# Altium PCB ATWork2022.PcbDoc
Units mm, origin at the board's own origin, x right, y up, seen from the top; angles counter-clockwise.
Board outline 126.49 x 105.16 mm, 2 copper layers (Top Layer, Bottom Layer); 99 components, 82 nets, 424 pads, 89 vias.
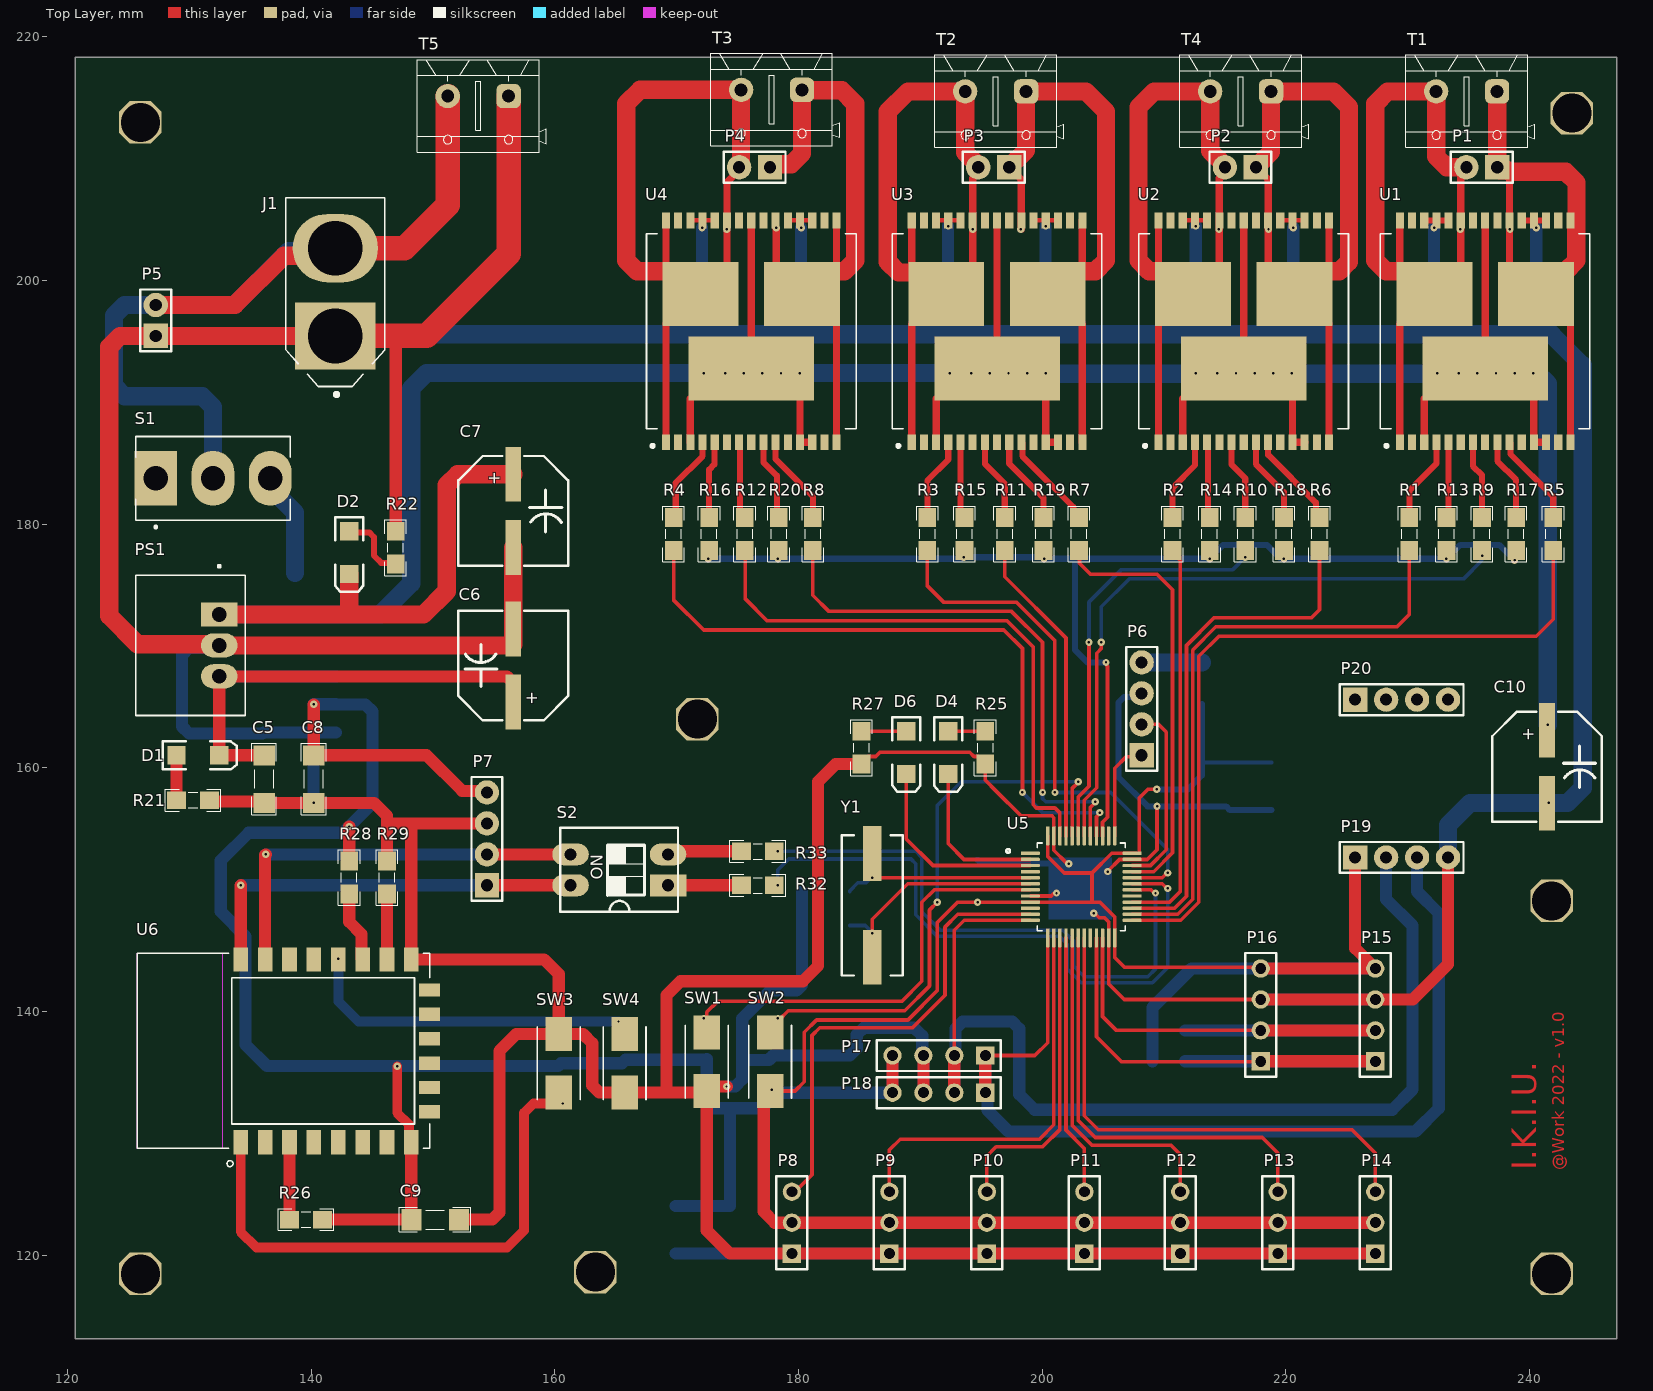
[diagram p0: Top Layer view]
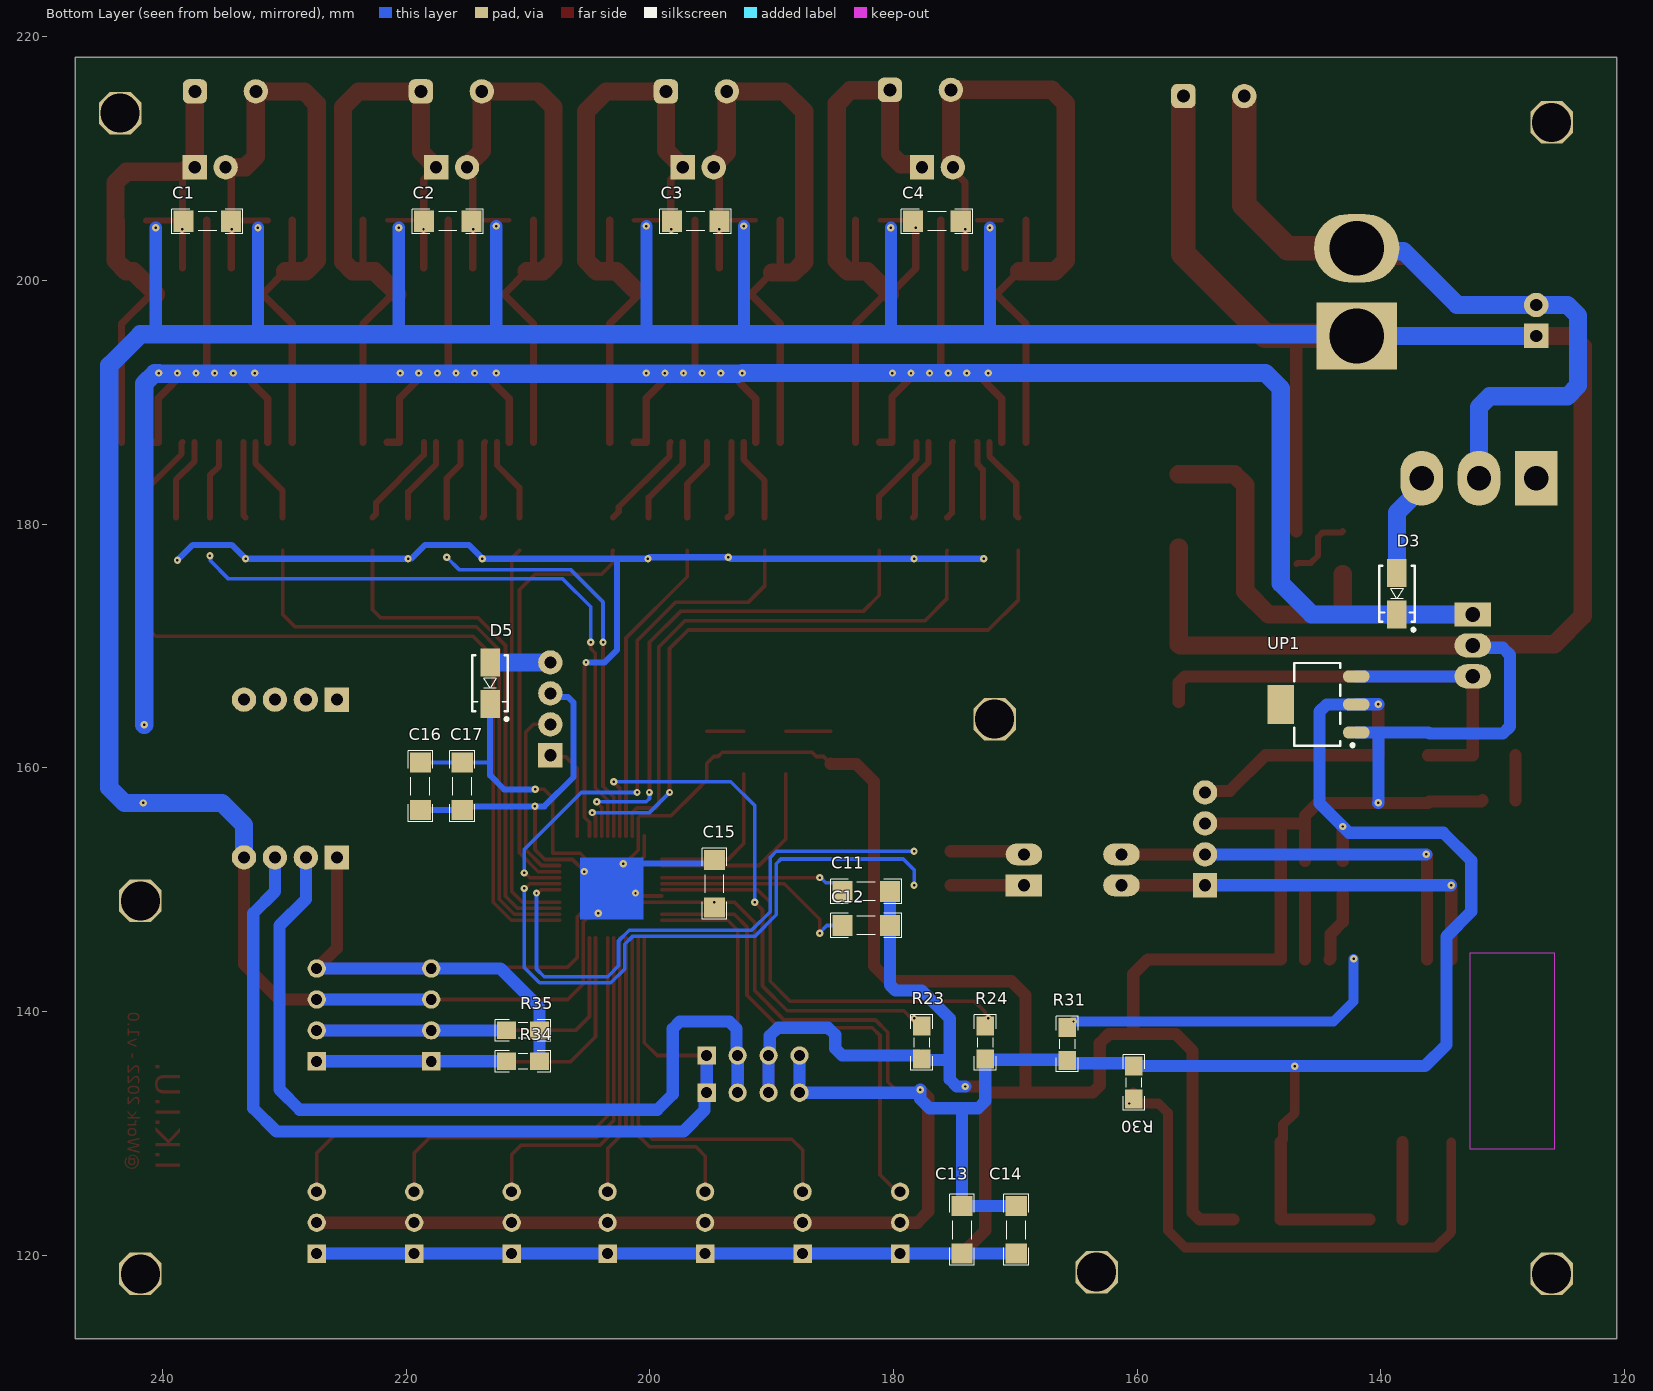
[diagram p1: Bottom Layer view, seen from below]
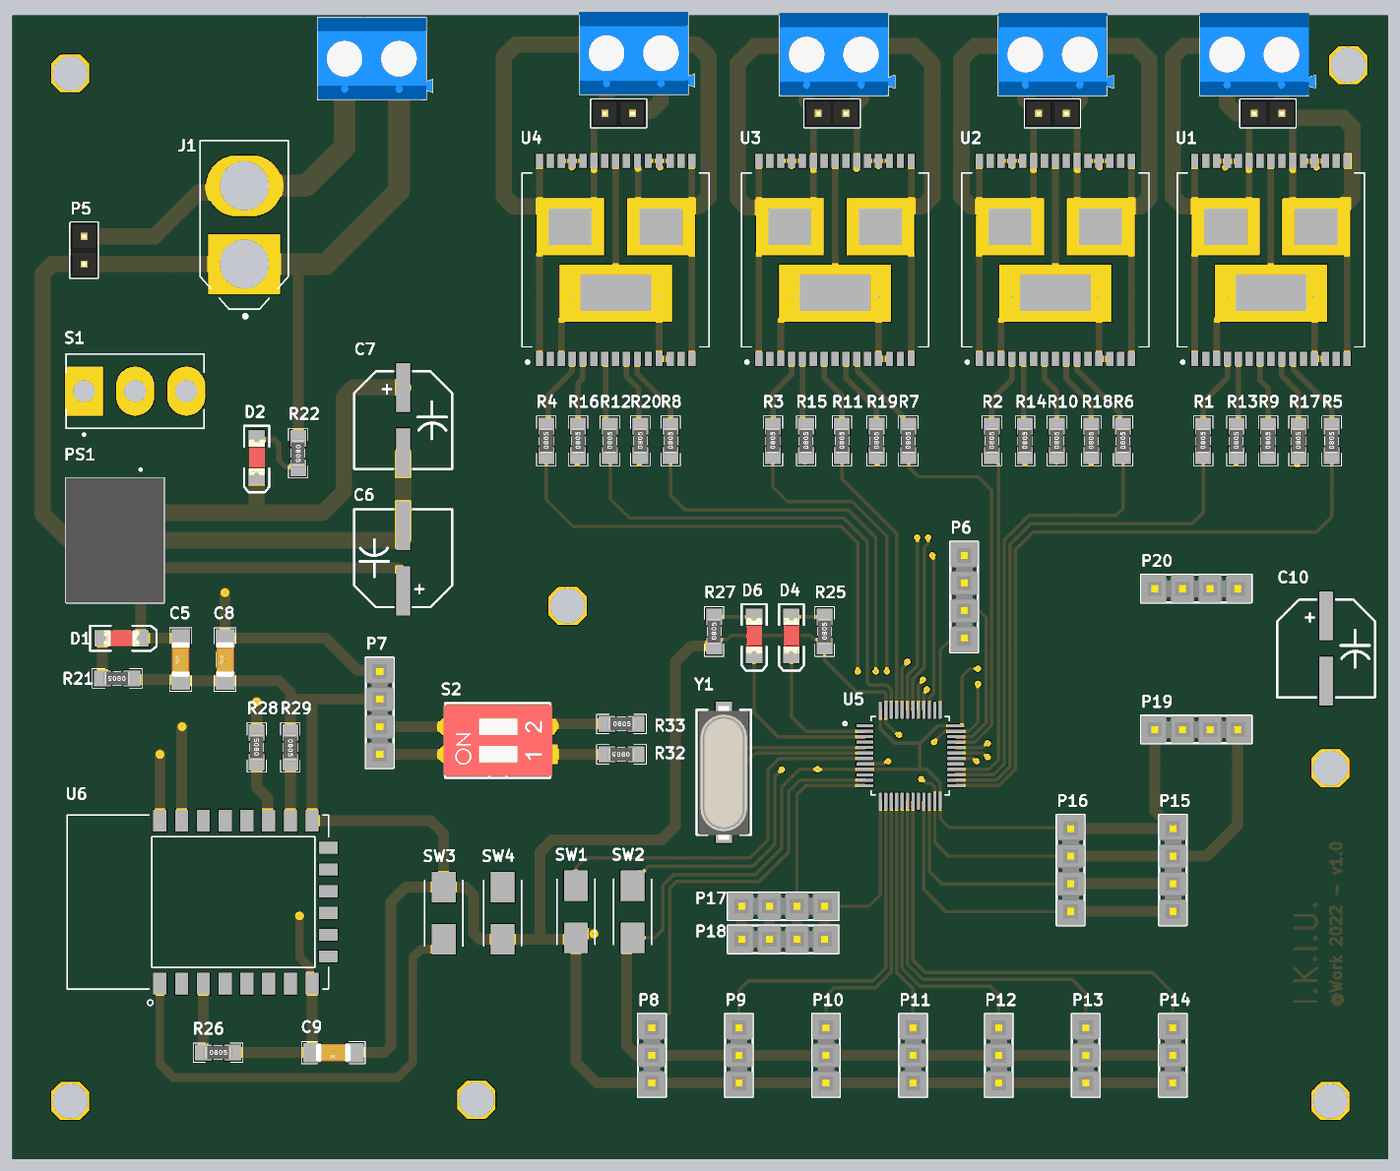
[diagram p2: 3D render of the assembled board from above, using the file's embedded part models]
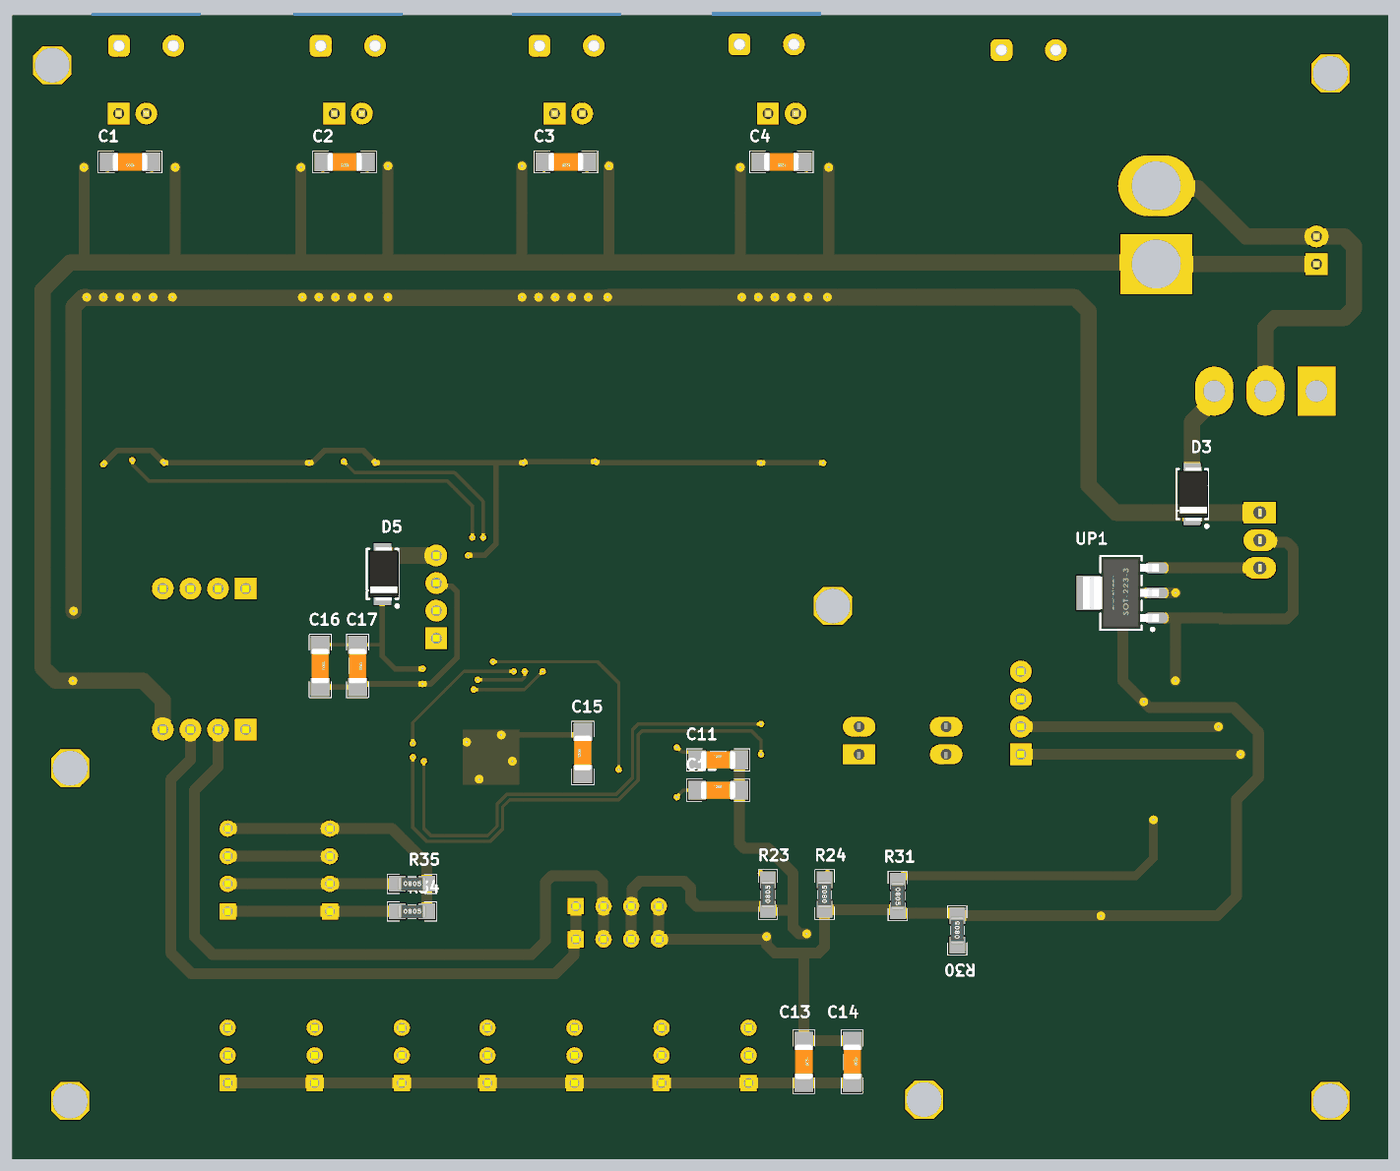
[diagram p3: 3D render of the assembled board from below, using the file's embedded part models]

## Layer stack, top to bottom
Top Solder: solder mask 0.0102, Solder Resist, Dk 3.5
Top Layer: signal copper 0.0356
Dielectric 1: dielectric 0.32, FR-4, Dk 4.8
Bottom Layer: signal copper 0.0356
Bottom Solder: solder mask 0.0102, Solder Resist, Dk 3.5

## Board outline
120.65,113.157 120.65,218.313 247.142,218.313 247.142,113.157

## Design rules (kind name [scope] priority, off if disabled: settings)
Clearance [All] p1: gap=0.2 ignorepadtopadclearanceinfootprint=FALSE except(0.7: Arc-Fill Arc-Poly Arc-Region Track-Fill Track-Poly Track-Region SMDPad-Fill SMDPad-Poly SMDPad-Region THPad-Fill THPad-Poly THPad-Region Via-Fill Via-Poly Via-Region Fill-Fill Fill-Poly Fill-Region Poly-Poly Poly-Region Region-Region)
PolygonConnect [All] p1: connectstyle=Relief reliefconductorwidth=0.3 reliefentries=4 polygonreliefangle="90 Angle" airgapwidth=0.3
RoutingVias [All] p1: holewidth=0.5 width=1 viastyle="Through Hole" minholewidth=0.1 minwidth=0.1 maxholewidth=10 maxwidth=10
SolderMaskExpansion [All] p1: expansion=0.102 istentingtop=FALSE
Width [All] p1: maxlimit=10 minlimit=0.2 preferedwidth=0.3
30 further rules are at their usual default settings.

## Components (designator, comment, footprint, x,y, rotation, side; value= is the part's Value field where it differs from the comment)
C1 "0.1uF" CAPC4817X12N 236.302,204.851 r0 bottom
C2 "0.1uF" CAPC4817X12N 216.58,204.851 r0 bottom
C3 "0.1uF" CAPC4817X12N 196.24,204.851 r0 bottom
C4 "0.1uF" CAPC4817X12N 176.433,204.851 r0 bottom
C5 "0.1uF" CAPC4817X12N 136.144,159.086 r90 top
C6 "100nF" "Cap SMD 100UF 35~50v" 156.591,168.402 r270 top
C7 "100nF" "Cap SMD 100UF 35~50v" 156.591,181.098 r90 top
C8 "0.1uF" CAPC4817X12N 140.224,159.086 r90 top
C9 "0.1uF" CAPC4817X12N 150.174,122.936 r180 top
C10 "100nF" "Cap SMD 100UF 35~50v" 241.427,160.099 r90 top
C11 "0.1uF" CAPC4817X12N 182.245,149.86 r180 bottom
C12 "0.1uF" CAPC4817X12N 182.245,147.066 r180 bottom
C13 "0.1uF" CAPC4817X12N 174.371,122.092 r270 bottom
C14 "0.1uF" CAPC4817X12N 169.926,122.092 r270 bottom
C15 "0.1uF" CAPC4817X12N 194.691,150.495 r90 bottom
C16 "0.1uF" CAPC4817X12N 218.821,158.496 r270 bottom
C17 "0.1uF" CAPC4817X12N 215.392,158.496 r270 bottom
D1 "SMD 1206 LED" "LED 1206" 130.711,161.036 r0 top
D2 "SMD 1206 LED" "LED 1206" 143.129,177.673 r270 top
D3 "1n4007" DIOM4629X24N 138.684,174.293 r270 bottom
D4 "SMD 1206 LED" "LED 1206" 192.278,161.262 r270 top
D5 "1n4007" DIOM4629X24N 213.106,166.956 r270 bottom
D6 "SMD 1206 LED" "LED 1206" 188.849,161.262 r270 top
J1 "XT60-M" *AMASS_XT60-M 141.986,199.053 r90 top
P1 "Header 2" HDR1X2 237.347,209.296 r180 top
P2 "Header 2" HDR1X2 217.535,209.296 r180 top
P3 "Header 2" HDR1X2 197.29,209.296 r180 top
P4 "Header 2" HDR1X2 177.663,209.296 r180 top
P5 "Header 2" HDR1X2 127.254,195.453 r90 top
P6 "Header 4" HDR1X4#1 208.153,161.036 r90 top
P7 "Header 4" HDR1X4#1 154.432,150.368 r90 top
P8 "Header 3" HDR1X3 179.451,120.142 r90 top
P9 "Header 3" HDR1X3 187.452,120.142 r90 top
P10 "Header 3" HDR1X3 195.453,120.142 r90 top
P11 "Header 3" HDR1X3 203.454,120.142 r90 top
P12 "Header 3" HDR1X3 211.328,120.142 r90 top
P13 "Header 3" HDR1X3 219.329,120.142 r90 top
P14 "Header 3" HDR1X3 227.33,120.142 r90 top
P15 "Header 4" HDR1X4#2 227.33,135.923 r90 top
P16 "Header 4" HDR1X4#2 217.932,135.923 r90 top
P17 "Header 4" HDR1X4#2 195.326,136.398 r180 top
P18 "Header 4" HDR1X4#2 195.326,133.35 r180 top
P19 "Header 4" HDR1X4#1 225.679,152.654 r0 top
P20 "Header 4" HDR1X4#1 225.679,165.608 r0 top
PS1 "K7805-2000R3" CONV_K7805-2000R3 130.111,170.053 r270 top
R1 "1K" RESC3413X04N 230.124,179.197 r90 top
R2 "1K" RESC3413X04N 210.693,179.197 r90 top
R3 "1K" RESC3413X04N 190.575,179.197 r90 top
R4 "1K" RESC3413X04N 169.747,179.197 r90 top
R5 "1K" RESC3413X04N 241.935,179.197 r90 top
R6 "1K" RESC3413X04N 222.758,179.197 r90 top
R7 "1K" RESC3413X04N 203.021,179.197 r90 top
R8 "1K" RESC3413X04N 181.177,179.197 r90 top
R9 "1K" RESC3413X04N 236.093,179.197 r90 top
R10 "1K" RESC3413X04N 216.662,179.197 r90 top
R11 "1K" RESC3413X04N 196.925,179.197 r90 top
R12 "1K" RESC3413X04N 175.589,179.197 r90 top
R13 "1K" RESC3413X04N 233.172,179.197 r90 top
R14 "1K" RESC3413X04N 213.741,179.197 r90 top
R15 "1K" RESC3413X04N 193.623,179.197 r90 top
R16 "1K" RESC3413X04N 172.668,179.197 r90 top
R17 "1K" RESC3413X04N 238.887,179.197 r90 top
R18 "1K" RESC3413X04N 219.837,179.197 r90 top
R19 "1K" RESC3413X04N 200.1,179.197 r90 top
R20 "1K" RESC3413X04N 178.383,179.197 r90 top
R21 "1K" RESC3413X04N 130.311,157.353 r180 top
R22 "1K" RESC3413X04N 146.939,178.073 r270 top
R23 "1K" RESC3413X04N 177.673,137.471 r90 bottom
R24 "1K" RESC3413X04N 172.466,137.471 r90 bottom
R25 "1K" RESC3413X04N 195.326,161.662 r90 top
R26 "1K" RESC3413X04N 139.574,122.936 r0 top
R27 "1K" RESC3413X04N 185.166,161.662 r90 top
R28 "1K" RESC3413X04N 143.129,151.003 r90 top
R29 "1K" RESC3413X04N 146.224,151.003 r270 top
R30 "1K" RESC3413X04N 160.274,134.182 r90 bottom
R31 "1K" RESC3413X04N 165.735,137.344 r270 bottom
R32 "1K" RESC3413X04N 176.657,150.368 r180 top
R33 "1K" RESC3413X04N 176.657,153.162 r0 top
R34 "1K" RESC3413X04N 210.392,135.923 r180 bottom
R35 "1K" RESC3413X04N 210.392,138.463 r180 bottom
S1 "" SW_100SP1T1B4M2QE 131.954,183.769 r90 top
S2 "DS2" "DIP Switch x2" 169.291,150.368 r90 top
SW1 "RESET" SW_147873-1 172.466,135.89 r270 top
SW2 "RESET" SW_147873-1 177.673,135.89 r270 top
SW3 "RESET" SW_147873-1 160.321,135.763 r90 top
SW4 "RESET" SW_147873-1 165.735,135.763 r270 top
T1 "KF301_Terminal" "KF301 2PIN" 234.823,215.519 r180 top
T2 "KF301_Terminal" "KF301 2PIN" 196.175,215.519 r180 top
T3 "KF301_Terminal" "KF301 2PIN" 177.788,215.646 r180 top
T4 "KF301_Terminal" "KF301 2PIN" 216.281,215.519 r180 top
T5 "KF301_Terminal" "KF301 2PIN" 153.71,215.138 r180 top (schematic designator T3)
U1 "U1" IC_MULTIPOWERSO-30TR 236.347,195.834 r90 top
U2 "U2" IC_MULTIPOWERSO-30TR 216.535,195.834 r90 top
U3 "U3" IC_MULTIPOWERSO-30TR 196.29,195.834 r90 top
U4 "U4" IC_MULTIPOWERSO-30TR 176.123,195.834 r90 top
U5 "STM32F103C8T6" QFP50P900X900X160-48N 203.2,150.241 r0 top
U6 "ESP8266-12E/ESP-12E" XCVR_ESP8266-12E/ESP-12E 141.224,136.779 r90 top
UP1 "3V3" SOT223 145.224,165.213 r0 bottom
Y1 "12 MHz" "Crystal SMD" 186.055,148.717 r90 top

## Footprints (in the part's own frame and the unit in brackets; to place one, negate y for a bottom-side part, rotate by r counter-clockwise, add the part's x,y. Pads: shape width x height; smd on the part's side, far side on the other; paste and mask are expansions set on the pad)
*AMASS_XT60-M [mm]
  rect 5.516x6.6 hole 4.5: 1(-3.6,0)
  oval 5.6x7 hole 4.5: 2(3.6,0)
  silkscreen extent -8.55,-4.05 7.75,4.05
"Cap SMD 100UF 35~50v" [mm]
  rect 4.5x1.3 smd: 1(3,0) 2(-3,0)
  silkscreen extent -4.5,-4.5 4.5,4.5
CAPC4817X12N [mm] "Chip Capacitor, 2-Leads, Body 4/80x1/70mm, IPC Medium Density-Design:Abbas Basereh"
  rect 1.65x1.75 smd: 1(-1.95,0) 2(1.95,0)
  silkscreen extent -2.92,-1.02 2.92,1.02, body extent -1.6,-0.8 1.6,0.8, height 1
CONV_K7805-2000R3 [mm]
  rect 2x3 hole 1.2: 1(-2.54,2.35)
  oval 2x3 hole 1.2: 2(0,2.35) 3(2.54,2.35)
  silkscreen extent -6.6,-4.5 5.75,4.5, body extent -5.75,-4.5 5.75,4.5, height 17.5
"Crystal SMD" [mm] "DESIGNER ABBAS BASEREH"
  rect 4.5x1.5 smd: 1(-4.25,0) 2(4.25,0)
  silkscreen extent -5.75,-2.5 5.75,2.5, body extent -6.21,-2.25 6.09,2.25, height 5.18
DIOM4629X24N [mm] "Molded Diode, 2-Leads, Body 4/60x2/90mm, IPC Medium Density-Design:Abbas Basereh"
  rect 2.3x1.6 smd: 1(-1.7,0) 2(1.7,0)
  silkscreen extent -2.3,-1.45 3.07,1.47, body extent -2.5,-1.22 2.5,1.48, height 2.2
"DIP Switch x2" [mm] "Switch DIP 2 way flat slide Thru-Hole-Design:Ali Hafizi"
  rect 1.8x3 hole 1: 1(0,0)
  oval 1.8x3 hole 1: 2(2.54,0) 3(2.54,8) 4(0,8)
  silkscreen extent -2.16,-0.82 4.71,8.83, body extent -1.98,-1.03 4.52,8.97, height 6.91
HDR1X2 [mm] "Connector; Header; 2 Position"
  rect 2x2 hole 1: 1(0,0)
  round 2 hole 1: 2(2.54,0)
  silkscreen extent -1.27,-1.27 3.81,1.27, body extent -1.27,-1.28 3.81,1.26, height 8.79
HDR1X3 [mm] "Connector; Header; 3 Position"
  rect 1.5x1.5 hole 0.9: 1(0,0)
  round 1.5 hole 0.9: 2(2.54,0) 3(5.08,0)
  silkscreen extent -1.27,-1.27 6.35,1.27, body extent -1.26,-1.27 6.36,1.27, height 8.38
HDR1X4#1 [mm] "Connector; Header; 4 Position"
  rect 2x2 hole 1: 1(0,0)
  round 2 hole 1: 2(2.54,0) 3(5.08,0) 4(7.62,0)
  silkscreen extent -1.27,-1.27 8.89,1.27, body extent -1.27,-1.28 8.89,1.26, height 8.38
HDR1X4#2 [mm] "Connector; Header; 4 Position"
  rect 1.5x1.5 hole 0.9: 1(0,0)
  round 1.5 hole 0.9: 2(2.54,0) 3(5.08,0) 4(7.62,0)
  silkscreen extent -1.27,-1.27 8.89,1.27, body extent -1.27,-1.28 8.89,1.26, height 8.38
IC_MULTIPOWERSO-30TR [mm]
  rect 1.3x0.665 smd: 1(-9.1,7) 2(-9.1,6) 3(-9.1,5) 4(-9.1,4) 5(-9.1,3) 6(-9.1,2) 7(-9.1,1) 8(-9.1,0) 9(-9.1,-1) 10(-9.1,-2) 11(-9.1,-3) 12(-9.1,-4) 13(-9.1,-5) 14(-9.1,-6) 15(-9.1,-7) 16(9.1,-7) 17(9.1,-6) 18(9.1,-5) 19(9.1,-4) 20(9.1,-3) 21(9.1,-2) 22(9.1,-1) 23(9.1,0) 24(9.1,1) 25(9.1,2) 26(9.1,3) 27(9.1,4) 28(9.1,5) 29(9.1,6) 30(9.1,7)
  rect 5.25x10.3 smd paste-6: HS1(-3.05,0)
  rect 5.25x6.23 smd paste-4: HS2(3.05,4.165) HS3(3.05,-4.165)
  silkscreen extent -9.5,-8.6 8,8.6
"KF301 2PIN" [mm] "Designer Abbas Basereh"
  rrect50% 2x2 hole 1.05: 1(-2.5,0)
  round 2 hole 1.05: 2(2.5,0)
  silkscreen extent -5.6,-3 5,4.6, body extent -5.6,-3 5,4.6, height 10
"LED 1206" [mm]
  rect 1.5x1.5 smd: 1(-1.75,0) 2(1.75,0)
  silkscreen extent -2.9,-1.15 3.2,1.15, body extent -1.65,-0.72 1.65,0.73, height 1.36
QFP50P900X900X160-48N [mm]
  rrect50% 1.56x0.28 smd: 1(-4.18,2.75) 2(-4.18,2.25) 3(-4.18,1.75) 4(-4.18,1.25) 5(-4.18,0.75) 6(-4.18,0.25) 7(-4.18,-0.25) 8(-4.18,-0.75) 9(-4.18,-1.25) 10(-4.18,-1.75) 11(-4.18,-2.25) 12(-4.18,-2.75) 25(4.18,-2.75) 26(4.18,-2.25) 27(4.18,-1.75) 28(4.18,-1.25) 29(4.18,-0.75) 30(4.18,-0.25) 31(4.18,0.25) 32(4.18,0.75) 33(4.18,1.25) 34(4.18,1.75) 35(4.18,2.25) 36(4.18,2.75)
  rrect50% 0.28x1.56 smd: 13(-2.75,-4.18) 14(-2.25,-4.18) 15(-1.75,-4.18) 16(-1.25,-4.18) 17(-0.75,-4.18) 18(-0.25,-4.18) 19(0.25,-4.18) 20(0.75,-4.18) 21(1.25,-4.18) 22(1.75,-4.18) 23(2.25,-4.18) 24(2.75,-4.18) 37(2.75,4.18) 38(2.25,4.18) 39(1.75,4.18) 40(1.25,4.18) 41(0.75,4.18) 42(0.25,4.18) 43(-0.25,4.18) 44(-0.75,4.18) 45(-1.25,4.18) 46(-1.75,4.18) 47(-2.25,4.18) 48(-2.75,4.18)
  silkscreen extent -6.15,-3.6 3.6,3.6
RESC3413X04N [mm] "Chip Resistor, 2-Leads, Body 3/40x1/30mm, IPC Medium Density-Design:Abbas Basereh"
  rect 1.55x1.45 smd: 1(-1.35,0) 2(1.35,0)
  silkscreen extent -2.29,-0.89 2.29,0.89, body extent -1.25,-0.62 1.25,0.62, height 0.79
SOT223 [mm] "SOT223, 4-Leads, Body 6.5x3.5mm, Pitch 2.30mm-Designer Abbas Basereh"
  oval 2.2x1 smd: 1(-3.2,2.3) 2(-3.2,0) 3(-3.2,-2.3)
  rect 2.2x3.2 smd: 4(3,0)
  Top Layer pour cut-out: -1.7,3.556 1.7,3.556 1.7,-3.556 -1.7,-3.556
  silkscreen extent -3.02,-3.4 1.9,3.47, body extent -3.5,-3.25 3.5,3.25, height 1.7
SW_100SP1T1B4M2QE [mm]
  rect 4.5x3.5 hole 2: 1(0,4.7)
  oval 4.5x3.5 hole 2: 2(0,0) 3(0,-4.7)
  silkscreen extent -4.1,-6.35 3.43,6.35
SW_147873-1 [mm]
  rect 2.8x2.2 smd: 1(-2.4,0) 2(2.4,0)
  silkscreen extent -3,-1.75 3,1.75
XCVR_ESP8266-12E/ESP-12E [mm]
  rect 2x1.2 smd: 1(-7.5,7) 2(-7.5,5) 3(-7.5,3) 4(-7.5,1) 5(-7.5,-1) 6(-7.5,-3) 7(-7.5,-5) 8(-7.5,-7) 15(7.5,-7) 16(7.5,-5) 17(7.5,-3) 18(7.5,-1) 19(7.5,1) 20(7.5,3) 21(7.5,5) 22(7.5,7)
  rect 1.1x1.7 smd: 9(-5,-8.5) 10(-3,-8.5) 11(-1,-8.5) 12(1,-8.5) 13(3,-8.5) 14(5,-8.5)
  Keep-Out Layer region: 8,8.51 -8.009,8.51 -8.009,15.5 8,15.5
  Keep-Out Layer region: 8,8.51 -8.009,8.51 -8.009,15.5 8,15.5
  silkscreen extent -9.5,-8.5 8,15.5

## Part data
C1 C2 C3 C4 C5 C8 C9 C11 C12 C13 C14 C15 C16 C17: library part "CAP SMD 1206", "CAP 1206", Data=16-12-2016, Desc.="CAP SMD 1206", Designer="Abbas Basereh"
C6 C7 C10: library part "CAP SMD PACKAGE", "TOTAL CAPACITOR SMD PACK", Data=2017-3-10, Desc.="CAP SMD TOTAL PACKAGES", Designer="Abbas Basereh"
D1 D2 D4 D6: library part "LED SMD 1206"
D3 D5: library part "1n4007 SMD M7", "Standard Rectifiers", Manufacturer="DC COMPONENTS", Data=16-12-2016, Designer="Abbas Basereh", Link=http://www.tme.eu/en/details/m7/smd-universal-diodes/dc-components/, Part. No=M7
J1: "Plug; DC supply; XT60; male; PIN: 2; for cable; soldered; 30A; 500V", Package="Package Analog Devices", Availability=Unavailable, MF=AMASS, MP=XT60-M, Price=None, SnapEDA_Link=https://www.snapeda.com/parts/XT60-M/AMASS/view-part/2883912/?ref=snap
P1 P2 P3 P4 P5: "Header, 2-Pin", LatestRevisionDate=17-Jul-2002, LatestRevisionNote="Re-released for DXP Platform.", Publisher="Altium Limited"
P6 P7 P15 P16 P17 P18 P19 P20: "Header, 4-Pin", LatestRevisionDate=17-Jul-2002, LatestRevisionNote="Re-released for DXP Platform.", Publisher="Altium Limited"
P8 P9 P10 P11 P12 P13 P14: "Header, 3-Pin", LatestRevisionDate=17-Jul-2002, LatestRevisionNote="Re-released for DXP Platform.", Publisher="Altium Limited"
PS1: "éžçµ¶ç¸åž‹ PoL ãƒ¢ã‚¸ãƒ¥ãƒ¼ãƒ« DC DC ã‚³ãƒ³ãƒãƒ¼ã‚¿ 1 å‡ºåŠ› 5V 2A 8V - 36V å…¥åŠ›", Package="SIP-3-3 MORNSUN", Check_prices=https://www.snapeda.com/parts/K7805-2000R3/MORNSUN/view-part/5366399/?ref=eda, Digi-Key_Part_Number=2725-K7805-2000R3-ND, MF="Mornsun America, LLC", MP=K7805-2000R3, SnapEDA_Link=https://www.snapeda.com/parts/K7805-2000R3/MORNSUN/view-part/5366399/?ref=snap
R1 R2 R3 R4 R5 R6 R7 R8 R9 R10 R11 R12 R13 R14 R15 R16 R17 R18 R19 R20 R21 R22 R23 R24 R25 R26 R27 R28 R29 R30 R31 R32 R33 R34 R35: library part "RES 0805 0.125W", "RES 0805", Data=16-12-2016, Desc.="RES SMD 0805", Designer="Abbas Basereh"
S1: library part 100SP1T1B4M2QE, "Toggle Switch SPDT Through Hole", Package=None, Availability=Unavailable, MP=100SP1T1B4M2QE, Price=None
S2: library part "DIP Switch 2", "2 BIT DIP Switch"
SW1 SW2 SW3 SW4: library part 147873-1, "Switch Tactile OFF (ON) SPST Rectangular Button J-Bend 0.05A 24VDC 1.77N SMD T/R", Package=None, Availability=Unavailable, MF="TE Connectivity", MP=147873-1, Price=None, SnapEDA_Link=https://www.snapeda.com/parts/147873-1/TE%20Connectivity%20ALCOSWITCH%20Switches/view-part/2549694/?ref=snap
T1 T2 T3 T4 T5: library part KF301-2Pin_Terminal, "Terminal 2 Pin 250VAC 16A", Designer="Abbas Basereh", Link=https://www.aliexpress.com/item/, Part. No="KF301 2P"
U1 U2 U3 U4: library part VNH5019A-E, "Motor Driver Power MOSFET Parallel, PWM MultiPowerSO-30", Package="PowerSOP-30 STMicroelectronics", Availability=Unavailable, MF=STMicroelectronics, MP=VNH5019A-E, Price=None, SnapEDA_Link=https://www.snapeda.com/parts/VNH5019A-E/STMicroelectronics/view-part/231156/?ref=snap
U5: "Mainstream Performance line, ARM Cortex-M3 MCU with 64 Kbytes Flash, 72 MHz CPU, motor control, USB and CAN", Package=None, Availability=Unavailable, MP=STM32F103C8T6, Price=None
U6: "ESP-12E WiFi Module", Package=None, Availability=Unavailable, MP=ESP8266-12E/ESP-12E, Price=None
UP1: library part AMS1117-x.x, "x.x Volt, 800mA Low-Dropout Linear Regulator, 4-pin SOT-223", Data=16-12-2016, Designer="Ali Hafizi"
Y1: library part XTAL, "XTAL Crystal", ComponentLink1Description=Datasheet, ComponentLink2Description=Reference, Design Date=2017-1-3, Designer="ABBAS BASEREH", Mounting Technology="Surface Mount\Through-Hole", Status=Unreleased

## Free pads (board coordinates)
  oct 3.5x3.5 hole 3.2: 2(125.984,118.491) 2(125.984,212.979) 2(163.322,118.618) 2(171.701,164.006) 2(241.808,118.491) 2(241.808,149.098) 2(243.459,213.741)

## Via types
v1: diameter 0.6, hole 0.2, Top Layer to Bottom Layer, 89 vias

## Nets (pads, with @x,y where several pads share a name; then routed paths per layer and width w, separated by ;. In a path a pad name is that pad's centre, name@x,y a point inside that pad or via, vN(x,y) a via of type N, cw(c..) or ccw(c..) an arc to the next point about the centre after c; other vN are vias at no path point)
+5: C5.2 C6.1 D1.2 PS1.3 UP1.3 | length 45.7
  Top Layer w1: C5.2 D1.2 PS1.3 156.08,167.513 156.591,167.002 C6.1
  Bottom Layer w1: PS1.3 UP1.3
+12: J1.2 P5.2 S1.2 T5.2 | length 77.2
  Top Layer w1.5: P5.2 133.731,197.993 137.768,202.03 141.363,202.03 J1.2
  Top Layer w2: J1.2 147.662,202.653 151.21,206.201 T5.2
  Bottom Layer w1.5: S1.2 131.954,189.621 131.075,190.5 124.704,190.5 123.825,191.379 123.825,197.114 124.704,197.993 P5.2 133.731,197.993 138.147,202.409 141.742,202.409 J1.2
ADC1: P8.3 U5.11 | length 39
  Top Layer w0.3: P8.3 179.705,125.222 181.102,126.619 181.102,138.049 181.737,138.684 189.357,138.684 192.024,141.351 192.024,146.939 193.076,147.991 U5.11
ADC4: P9.3 U5.14 | length 33.1
  Top Layer w0.3: P9.3 187.452,128.651 188.341,129.54 199.771,129.54 200.95,130.719 U5.14
ADC5: P10.3 U5.15 | length 25.6
  Top Layer w0.3: P10.3 195.453,128.143 196.215,128.905 200.025,128.905 201.45,130.33 U5.15
ADC6: P11.3 U5.16 | length 21.5
  Top Layer w0.3: U5.16 201.95,130.282 203.454,128.778 P11.3
ADC7: P12.3 U5.17 | length 28.3
  Top Layer w0.3: U5.17 202.45,130.671 204.089,129.032 210.566,129.032 211.328,128.27 P12.3
ADC8: P13.3 U5.18 | length 35.7
  Top Layer w0.3: U5.18 202.95,131.06 204.343,129.667 218.059,129.667 219.329,128.397 P13.3
ADC9: P14.3 U5.19 | length 42.9
  Top Layer w0.3: U5.19 203.45,131.449 204.597,130.302 225.425,130.302 227.33,128.397 P14.3
BOOT0: R23.2 SW2.1 U5.44 | length 48.1
  Top Layer w0.3: SW2.1 SW2.1@177.673,138.557 ; v1(178.308,139.446) 177.673,138.811 SW2.1@177.673,138.557 ; v1(191.389,148.971) 190.754,148.336 190.754,142.113 188.722,140.081 179.164,140.081 178.435,139.352 178.435,139.319 SW2.1@177.673,138.557 ; U5.44 202.45,158.312 202.946,158.808 v1(202.946,158.877)
  Bottom Layer w0.3: v1(191.389,148.971) 191.389,156.915 193.351,158.877 v1(202.946,158.877)
ESP_BOOT: R31.1 SW4.1 U6.18 | length 27.2
  Bottom Layer w0.8: v1(142.24,144.343) 142.24,140.843 143.891,139.192 v1(165.227,139.192)
ESP_RST: R30.1 SW3.1 U6.1 | length 45.8
  Top Layer w0.8: U6.1 134.224,121.935 135.509,120.65 156.083,120.65 157.48,122.047 157.48,131.699 158.242,132.461 v1(160.655,132.461) ; SW3.1@160.321,132.461 SW3.1
ESP_RX: P7.2 S2.3 U6.21 | length 33.7
  Top Layer w1: U6.21 136.224,152.861 v1(136.271,152.908) ; P7.2 S2.3
  Bottom Layer w1: v1(136.271,152.908) P7.2
ESP_TX: P7.1 S2.4 U6.22 | length 33.1
  Top Layer w1: U6.22 134.224,150.353 v1(134.239,150.368) ; P7.1 S2.4
  Bottom Layer w1: v1(134.239,150.368) P7.1
GND: C5.1 C6.2 C7.2 C8.1 C9.1 C10.2 C11.2 C12.2 C13.2 C14.2 C15.2 C16.2 C17.2 J1.1 P5.1 P6.3 P7.3 P8.1 P9.1 P10.1 P11.1 P12.1 P13.1 P14.1 P15.3 P16.3 P17.3 P18.3 P19.4 PS1.2 R21.1 R22.1 R23.1 R25.1 R27.1 R29.1 SW1.2 SW3.2 SW4.2 T5.1 U1.18 U1.19 U1.20 U1.26 U1.27 U1.28 U2.18 U2.19 U2.20 U2.26 U2.27 U2.28 U3.18 U3.19 U3.20 U3.26 U3.27 U3.28 U4.18 U4.19 U4.20 U4.26 U4.27 U4.28 U5.8 U5.23 U5.35 U5.47 U6.15 UP1.1 | length 840.2
  Top Layer w0.3: SW1.2 SW1.2@172.834,133.858 ; R27.1@185.166,160.362 185.741,160.937 186.337,160.937 186.69,161.29 194.056,161.29 194.409,160.937 194.751,160.937 195.326,160.362 R25.1 195.326,159.004 196.215,158.115 196.215,158.111 198.235,156.091 200.774,156.091 200.95,155.915 200.95,153.253 202,152.203 202.127,152.203 v1(202.184,152.146) ; U5.8 200.718,149.491 200.902,149.676 201.111,149.676 v1(201.168,149.733) ; v1(204.216,148.082) 204.297,148.082 204.678,147.701 205.105,147.701 205.45,147.356 U5.23 205.45,142.276 206.723,141.003 P16.3 ; v1(205.374,151.496) 205.374,151.526 206.339,152.491 208.625,152.491 209.423,153.289 v1(209.423,156.845)
  Top Layer w0.381: U4.28 U4.27 U4.26 ; U4.20 U4.19 U4.18 ; U3.28 U3.27 U3.26 ; U3.20 U3.19 U3.18 ; U2.28 U2.27 U2.26 ; U2.20 U2.19 U2.18
  Top Layer w0.5: U1.28 U1.27 U1.26 ; U1.20 U1.19 U1.18
  Top Layer w1: R21.1 131.77,157.245 136.035,157.245 C5.1 v1(140.224,157.136) 145.171,157.136 146.224,156.083 146.224,155.655 ; J1.1 145.669,195.453 ; R29.1 146.224,155.655 ; R22.1 146.939,195.453 ; C9.1 154.862,122.936 155.448,123.522 155.448,136.779 156.832,138.163 SW3.2 ; P7.3 148.209,155.448 ; SW1.2@172.834,133.858 v1(174.117,133.858) ; R27.1@185.166,160.362 R27.1 183.045,160.312 181.61,158.877 181.61,143.764 180.34,142.494 170.307,142.494 169.164,141.351 169.164,133.363 ; P18.3 P17.3 ; P16.3 P15.3 230.411,141.003 233.299,143.891 P19.4 ; P14.1 P13.1 P12.1 P11.1 P10.1 P9.1 P8.1 174.371,120.142 172.466,122.047 SW1.2 172.339,133.363 169.164,133.363 ; 146.224,155.655 146.431,155.448 148.209,155.448 ; 148.209,155.448 148.224,155.433 U6.15 159.124,144.279 160.321,143.082 SW3.2 ; SW3.2 160.334,138.176 162.306,138.176 163.068,137.414 163.068,133.949 163.654,133.363 SW4.2 169.164,133.363
  Top Layer w1.5: J1.1 P5.1 124.333,195.453 123.444,194.564 123.444,172.466 125.761,170.149 132.365,170.149 PS1.2 156.491,170.053 156.591,170.153 C6.2 C7.2
  Top Layer w2: J1.1@142.528,195.453 J1.1 145.669,195.453 146.939,195.453 149.479,195.453 156.21,202.184 T5.1
  Bottom Layer w0.5: 180.213,195.707 180.34,195.58 ; 192.278,195.707 192.405,195.58 ; C15.2 194.99,152.146 v1(202.184,152.146) ; P6.3 207.866,165.829 206.723,165.829 206.248,165.354 206.248,159.258 208.661,156.845 215.093,156.845 C17.2 C16.2 ; 220.599,195.707 220.726,195.58
  Bottom Layer w1: PS1.2 132.27,169.862 129.999,169.862 129.413,169.276 129.413,163.4 129.999,162.814 136.004,162.814 136.103,162.913 140.434,162.913 ; v1(140.224,157.136) 140.208,157.152 140.208,162.687 140.434,162.913 ; UP1.1 140.434,162.913 ; C14.2 C13.2 P8.1 P9.1 P10.1 P11.1 P12.1 P13.1 P14.1 ; 172.085,195.58 v1(172.085,204.343) ; v1(174.117,133.858) 174.801,133.858 175.387,134.444 175.387,136.034 ; 180.213,195.707 v1(180.213,204.343) ; C11.2 C12.2 180.295,142.195 179.832,141.732 177.673,141.732 175.387,139.446 175.387,136.034 ; P18.3 P17.3 190.15,136.494 190.15,138.018 189.484,138.684 185.371,138.684 184.785,138.098 184.785,136.984 184.199,136.398 177.95,136.398 177.948,136.396 177.898,136.396 177.673,136.171 R23.1 177.586,136.034 175.387,136.034 ; 192.278,195.707 v1(192.278,204.47) ; 200.279,195.58 v1(200.279,204.47) ; 212.598,195.58 v1(212.598,204.47) ; P16.3 P15.3 ; 220.599,195.707 v1(220.599,204.343) ; 232.156,195.58 v1(232.156,204.343) ; 240.538,195.58 v1(240.538,204.343)
  Bottom Layer w1.5: P5.1 J1.1 142.113,195.58 172.085,195.58 180.34,195.58 192.405,195.58 200.279,195.58 212.598,195.58 220.726,195.58 232.156,195.58 240.538,195.58 241.808,195.58 244.348,193.04 244.348,158.369 243.109,157.13 235.108,157.13 233.299,155.321 P19.4
  other v1: 241.554,157.13
I2C_SCL: P15.1 P16.1 R34.1 U5.21 | length 47.5
  Top Layer w0.3: U5.21 204.45,137.942 206.502,135.89 217.899,135.89 P16.1
  Top Layer w1: P16.1 P15.1
  Bottom Layer w1: R34.1 P16.1 P15.1
I2C_SDA: P15.2 P16.2 R35.1 U5.22 | length 44.9
  Top Layer w0.3: U5.22 204.95,139.601 206.088,138.463 P16.2
  Top Layer w1: P16.2 P15.2
  Bottom Layer w1: R35.1 P16.2 P15.2
INA1: R1.1 U5.26 | length 50.2
  Top Layer w0.3: U5.26 211.11,147.991 212.344,149.225 212.344,169.672 214.249,171.577 229.108,171.577 230.124,172.593 R1.1
INA2: R2.1 U5.28 | length 32.6
  Top Layer w0.3: U5.28 210.459,148.991 211.328,149.86 211.328,177.046 211.268,177.106 211.268,177.272 R2.1
INA3: R3.1 U5.32 | length 43.9
  Top Layer w0.3: R3.1 190.575,174.931 191.897,173.609 197.866,173.609 201.041,170.434 v1(201.041,157.988) ; U5.32 209.838,150.991 210.231,151.384 v1(210.312,151.384)
  Bottom Layer w0.3: v1(201.041,157.988) 205.613,157.988 210.312,153.289 v1(210.312,151.384)
INA4: R4.1 U5.40 | length 55.2
  Top Layer w0.3: R4.1 169.747,173.788 172.212,171.323 196.85,171.323 198.374,169.799 v1(198.374,157.988) ; U5.40 204.45,155.997 204.709,156.256 v1(204.709,156.337)
  Bottom Layer w0.3: v1(198.374,157.988) 200.025,156.337 v1(204.709,156.337)
INB1: R5.1 U5.25 | length 62.3
  Top Layer w0.3: U5.25 211.372,147.491 212.852,148.971 212.852,169.164 214.503,170.815 240.538,170.815 241.935,172.212 R5.1
INB2: R6.1 U5.27 | length 42.4
  Top Layer w0.3: U5.27 210.848,148.491 211.836,149.479 211.836,170.053 214.122,172.339 222.123,172.339 222.758,172.974 R6.1
INB3: R7.1 U5.33 | length 35.1
  Top Layer w0.3: R7.1 203.059,177.809 203.059,176.798 203.962,175.895 209.423,175.895 210.693,174.625 210.693,153.035 209.149,151.491 U5.33
INB4: R8.1 U5.41 | length 44.3
  Top Layer w0.3: R8.1 181.177,174.169 182.499,172.847 197.485,172.847 200.025,170.307 v1(200.025,157.988) ; U5.41 203.95,156.752 204.343,157.145 v1(204.343,157.226)
  Bottom Layer w0.3: v1(200.025,157.988) 200.025,157.48 200.279,157.226 v1(204.343,157.226)
LED1: D4.2 U5.2 | length 13
  Top Layer w0.3: D4.2 192.278,153.797 193.584,152.491 U5.2
LED2: D6.2 U5.3 | length 16.4
  Top Layer w0.3: D6.2 188.849,154.178 191.036,151.991 U5.3
MOTORS_EN: R13.1 R14.1 R15.1 R16.1 R17.1 R18.1 R19.1 R20.1 U5.39 | length 93.1
  Top Layer w0.3: U5.39 204.95,155.547 205.359,155.956 205.359,168.33 205.289,168.4 205.289,168.599 v1(205.232,168.656)
  Bottom Layer w0.5: v1(172.593,177.165) 193.394,177.165 193.521,177.292 v1(193.548,177.292) 199.998,177.292 200.125,177.165 v1(200.152,177.165) 202.692,177.165 ; v1(205.232,168.656) 203.708,168.656 202.692,169.672 202.692,177.165 ; v1(238.76,177.038) 237.49,178.308 234.315,178.308 v1(233.172,177.165) v1(219.837,177.165) 219.818,177.184 219.564,177.184 218.44,178.308 214.857,178.308 213.741,177.192 v1(213.741,177.165) 202.692,177.165
  other v1: 178.308,177.165
NetD1_1: D1.1 R21.2 | length 3.7
  Top Layer w1: R21.2 D1.1
NetD2_1: D2.1 R22.2 | length 5.8
  Top Layer w0.5: D2.1 143.228,179.324 144.78,179.324 145.161,178.943 145.161,177.419 145.757,176.823 146.839,176.823 R22.2
NetD3_1: D3.1 S1.3 | length 8.6
  Bottom Layer w1.5: S1.3 136.654,182.978 138.684,180.948 D3.1
NetD4_1: D4.1 R25.2 | length 3
  Top Layer w0.3: D4.1 R25.2
NetD5_1: D5.1 P6.4 | length 5
  Bottom Layer w1.5: P6.4 D5.1
NetD6_1: D6.1 R27.2 | length 3.7
  Top Layer w0.3: R27.2 D6.1
NetR1_2: R1.2 U1.4 | length 7.1
  Top Layer w0.5: R1.2 230.124,182.753 232.347,184.976 U1.4
NetR2_2: R2.2 U2.4 | length 6.9
  Top Layer w0.5: R2.2 210.693,183.007 212.535,184.849 U2.4
NetR3_2: R3.2 U3.4 | length 6.9
  Top Layer w0.5: R3.2 190.575,183.59 192.29,185.305 U3.4
NetR4_2: R4.2 U4.4 | length 7.2
  Top Layer w0.5: R4.2 169.926,180.726 169.926,183.388 172.123,185.585 U4.4
NetR5_2: R5.2 U1.10 | length 7.7
  Top Layer w0.5: U1.10 238.418,186.663 238.418,185.762 241.935,182.245 R5.2
NetR6_2: R6.2 U2.10 | length 7.9
  Top Layer w0.5: U2.10 218.543,186.726 218.543,185.698 222.462,181.779 222.462,180.843 R6.2
NetR7_2: R7.2 U3.10 | length 8.1
  Top Layer w0.5: U3.10 198.373,186.651 198.373,185.587 202.546,181.414 202.546,181.022 R7.2
NetR8_2: R8.2 U4.10 | length 7.5
  Top Layer w0.5: U4.10 178.123,185.351 181.177,182.297 R8.2
NetR9_2: R9.2 U1.7 | length 6.5
  Top Layer w0.5: U1.7 235.347,184.769 236.093,184.023 R9.2
NetR10_2: R10.2 U2.7 | length 6.7
  Top Layer w0.5: U2.7 215.535,184.896 216.662,183.769 R10.2
NetR11_2: R11.2 U3.7 | length 6.9
  Top Layer w0.5: U3.7 195.29,184.948 196.925,183.313 R11.2
NetR12_2: R12.2 U4.7 | length 6.4
  Top Layer w0.5: U4.7 175.206,186.652 175.206,180.93 R12.2
NetR13_2: R13.2 U1.5 | length 6.3
  Top Layer w0.5: R13.2 233.347,180.722 U1.5
NetR14_2: R14.2 U2.5 | length 6.3
  Top Layer w0.5: U2.5 213.618,186.651 213.618,180.67 R14.2
NetR15_2: R15.2 U3.5 | length 6.3
  Top Layer w0.5: U3.5 193.29,180.88 R15.2
NetR16_2: R16.2 U4.5 | length 6.4
  Top Layer w0.5: R16.2 172.668,184.479 173.101,184.912 173.101,186.712 U4.5
NetR17_2: R17.2 U1.9 | length 6.8
  Top Layer w0.5: U1.9 237.347,185.182 238.887,183.642 R17.2
NetR18_2: R18.2 U2.9 | length 7.1
  Top Layer w0.5: U2.9 217.535,184.928 219.837,182.626 R18.2
NetR19_2: R19.2 U3.9 | length 7.4
  Top Layer w0.5: U3.9 197.29,184.98 200.1,182.17 R19.2
NetR20_2: R20.2 U4.9 | length 6.7
  Top Layer w0.5: U4.9 177.123,185.081 178.227,183.977 178.227,180.703 R20.2
NetR26_1: R26.1 U6.3 | length 6.3
  Top Layer w1: R26.1 U6.3
NetR28_1: R28.1 U6.17 | length 5.8
  Top Layer w1: R28.1 143.129,147.378 144.124,146.383 144.124,144.379 U6.17
NetR29_2: R29.2 U6.16 | length 5.4
  Top Layer w1: U6.16 R29.2
NetR32_2: R32.2 S2.1 | length 6
  Top Layer w1: S2.1 R32.2
NetR33_1: R33.1 S2.2 | length 6.1
  Top Layer w1: S2.2 169.926,152.908 170.18,153.162 R33.1
NRST: R24.2 SW1.1 U5.7 | length 36.2
  Top Layer w0.3: SW1.1 172.476,138.3 172.476,139.964 173.355,140.843 188.468,140.843 190.119,142.494 190.119,148.971 191.139,149.991 U5.7
  other v1: 172.212,139.446
OSC_IN: C11.1 U5.5 Y1.2 | length 15.3
  Top Layer w0.3: v1(186.055,151.003) 186.067,150.991 U5.5
  Bottom Layer w0.3: C11.1 184.195,149.91 184.87,150.585 185.556,150.585 185.974,151.003 v1(186.055,151.003)
OSC_OUT: C12.1 U5.6 Y1.1 | length 17.5
  Top Layer w0.3: v1(186.055,146.431) 186.055,147.574 188.972,150.491 U5.6
  Bottom Layer w0.3: C12.1 185.47,147.066 186.055,146.481 v1(186.055,146.431)
OUT1_1: C1.1 P1.2 T1.2 U1.1 U1.25 U1.30 U1.HS2 | length 58.1
  Top Layer w0.6: U1.1 229.347,196.449 231.781,198.884 229.906,200.759 229.347,201.319 U1.30 ; U1.HS2@234.347,201.049 U1.25 234.347,208.457 234.807,208.917 P1.2
  Top Layer w1.5: U1.HS2@229.906,200.759 228.209,200.759 227.33,201.638 227.33,214.503 228.346,215.519 T1.2 232.323,210.175 233.202,209.296 P1.2
  other v1: 234.315,204.216
OUT1_2: C2.1 P2.2 T4.2 U2.1 U2.25 U2.30 U2.HS2 | length 57
  Top Layer w0.6: U2.1 209.535,196.449 211.969,198.884 210.094,200.759 209.535,201.319 U2.30 ; U2.HS2@214.535,201.049 U2.25 214.535,208.398 214.995,208.858 P2.2
  Top Layer w1.5: U2.HS2@210.094,200.759 208.778,200.759 207.899,201.638 207.899,214.249 209.169,215.519 T4.2 213.781,210.645 214.995,209.431 P2.2
  other v1: 214.503,204.216
OUT1_3: C3.1 P3.2 T2.2 U3.1 U3.25 U3.30 U3.HS2 | length 57.7
  Top Layer w0.6: U3.1 189.29,196.449 191.725,198.884 189.948,200.66 189.29,201.319 U3.30 ; U3.HS2@194.29,201.049 U3.25 194.29,208.398 194.75,208.858 P3.2
  Top Layer w1.5: U3.HS2@189.948,200.66 188.204,200.66 187.325,201.539 187.325,213.868 188.976,215.519 T2.2 193.675,210.506 194.75,209.431 P3.2
  other v1: 194.31,204.216
OUT1_4: C4.1 P4.2 T3.2 U4.1 U4.25 U4.30 U4.HS2 | length 62.3
  Top Layer w0.6: U4.1 169.123,196.45 171.558,198.884 169.683,200.759 169.123,201.319 U4.30 ; U4.HS2@174.123,201.049 U4.25 174.123,208.074 175.123,209.074 P4.2
  Top Layer w1.5: U4.HS2@169.683,200.759 166.741,200.759 165.862,201.638 165.862,214.513 166.995,215.646 T3.2 175.288,209.596 175.123,209.431 P4.2
  other v1: 174.117,204.216
OUT2_1: C1.2 P1.1 T1.1 U1.15 U1.16 U1.21 U1.HS3 | length 48.1
  Top Layer w0.6: U1.HS3@238.347,201.049 238.347,204.216 U1.21 P1.1@238.347,208.296 ; U1.HS3@240.913,198.884 243.347,196.449 U1.15 ; U1.HS3@243.347,201.319 U1.16
  Top Layer w1.5: T1.1 237.335,215.507 237.335,209.308 237.597,209.046 238.216,209.046 238.347,208.915 242.961,208.915 243.84,208.036 243.84,201.638 242.961,200.759 242.387,200.759 U1.HS3
  other v1: 238.379,204.216
OUT2_2: C2.2 P2.1 T4.1 U2.15 U2.16 U2.21 U2.HS3 | length 60.8
  Top Layer w0.6: P2.1 218.535,208.296 U2.21 U2.HS3@218.535,201.049 ; U2.15 223.535,196.449 221.101,198.884 222.976,200.759 223.535,201.319 U2.16
  Top Layer w1.5: P2.1 218.781,210.542 T4.1 223.901,215.519 225.171,214.249 225.171,201.549 224.381,200.759 222.976,200.759 222.575,200.759 U2.HS3
  other v1: 218.567,204.216
OUT2_3: C3.2 P3.1 T2.1 U3.15 U3.16 U3.21 U3.HS3 | length 57
  Top Layer w0.6: P3.1 198.29,208.296 U3.21 v1@198.29,204.216 ; U3.15 203.29,196.449 200.856,198.884 201.235,199.263 203.29,201.319 U3.16
  Top Layer w1.5: P3.1 198.675,210.681 T2.1 203.581,215.519 205.232,213.868 205.232,201.638 204.353,200.759 202.731,200.759 U3.HS3@201.235,199.263
  other v1: 198.247,204.216
OUT2_4: C4.2 P4.1 T3.1 U4.15 U4.16 U4.21 U4.HS3 | length 55.5
  Top Layer w0.6: U4.21@178.123,204.342 178.181,204.284 178.181,200.991 U4.HS3 ; U4.HS3@180.689,198.884 183.123,196.45 U4.15 ; U4.HS3@182.564,200.759 183.123,201.319 U4.16
  Top Layer w1.5: P4.1 177.913,209.546 179.409,209.546 180.288,210.425 T3.1 180.311,215.623 183.538,215.623 184.658,214.503 184.658,201.638 183.779,200.759 182.564,200.759 182.163,200.759 U4.HS3
  other v1: 178.181,204.343
PWM1: R9.1 U5.42 | length 52.6
  Top Layer w0.3: U5.42 203.45,157.349 204.47,158.369 204.47,169.418 204.851,169.799 v1(204.851,170.307)
  Bottom Layer w0.3: v1(204.851,170.307) 204.851,173.228 207.137,175.514 234.569,175.514 236.053,176.998 236.053,177.379 v1(236.093,177.419)
PWM2: R10.1 U5.43 | length 33.9
  Top Layer w0.3: U5.43 202.95,157.611 203.835,158.496 v1(203.835,170.307)
  Bottom Layer w0.3: v1(203.835,170.307) 203.835,173.609 206.502,176.276 215.646,176.276 v1(216.662,177.292)
PWM3: R11.1 U5.45 | length 25.5
  Top Layer w0.3: R11.1 196.925,175.693 201.95,170.668 U5.45
PWM4: R12.1 U5.46 | length 46.6
  Top Layer w0.3: R12.1 175.641,177.795 175.641,173.863 177.419,172.085 197.104,172.085 199.263,169.926 199.263,156.972 199.517,156.718 201.041,156.718 201.45,156.309 U5.46
SWCLK: P6.1 U5.37 | length 8.2
  Top Layer w0.3: U5.37 205.95,159.976 206.879,160.905 208.022,160.905 P6.1
SWDIO: P6.2 U5.34 | length 15.3
  Top Layer w0.3: U5.34 208.887,151.991 210.185,153.289 210.185,162.941 209.55,163.576 P6.2
UART1_RX: R32.1 U5.31 | length 51.6
  Top Layer w0.3: U5.31 209.854,150.491 210.231,150.114 v1(210.312,150.114)
  Bottom Layer w0.3: v1(178.308,150.368) 178.308,151.638 179.197,152.527 189.23,152.527 189.611,152.146 189.611,147.955 191.389,146.177 201.422,146.177 202.057,145.542 202.057,143.51 203.2,142.367 209.042,142.367 210.312,143.637 v1(210.312,150.114)
UART1_TX: R33.2 U5.30 | length 47.6
  Top Layer w0.3: U5.30 208.957,149.991 209.215,149.733 v1(209.296,149.733)
  Bottom Layer w0.3: v1(178.308,153.162) 189.611,153.162 190.119,152.654 190.119,148.209 191.643,146.685 201.676,146.685 202.565,145.796 202.565,143.764 203.454,142.875 208.661,142.875 209.296,143.51 v1(209.296,149.733)
UART2_RX: P17.1 P18.1 P19.3 U5.13 | length 81.4
  Top Layer w0.3: P17.1 199.39,136.398 200.45,137.458 U5.13
  Top Layer w1: P18.1 P17.1
  Bottom Layer w1: P17.1 P18.1 195.502,133.174 195.502,131.904 197.231,130.175 230.632,130.175 232.537,132.08 232.537,148.082 230.759,149.86 P19.3@230.759,152.4
UART2_TX: P17.2 P18.2 P19.2 U5.12 | length 89.5
  Top Layer w0.3: P17.2@192.786,136.591 192.786,146.685 193.592,147.491 U5.12
  Top Layer w1: P18.2 P17.2
  Bottom Layer w1: P18.2 P17.2 192.882,136.494 192.882,138.606 193.467,139.192 197.534,139.192 198.12,138.606 198.12,133.223 199.39,131.953 228.727,131.953 230.378,133.604 230.378,147.066 228.219,149.225 P19.2
VBAT: C7.1 C10.1 D2.2 D3.2 PS1.1 U1.3 U1.12 U1.13 U1.23 U1.HS1 U2.3 U2.12 U2.13 U2.23 U2.HS1 U3.3 U3.12 U3.13 U3.23 U3.HS1 U4.3 U4.12 U4.13 U4.23 U4.HS1 | length 318.7
  Top Layer w0.6: U4.3 171.123,190.309 173.598,192.784 U4.HS1 ; U4.23 U4.HS1 ; v1(178.562,192.405) 178.183,192.784 U4.HS1@177.498,192.784 ; U4.13 U4.12 180.123,190.459 177.798,192.784 U4.HS1@177.498,192.784 ; U3.3 191.29,190.309 193.765,192.784 U3.HS1 ; U3.23 U3.HS1 ; U3.13 U3.12 200.29,190.349 197.855,192.784 U3.HS1 ; U2.3 211.535,190.309 214.01,192.784 U2.HS1 ; U2.23 U2.HS1 ; U2.13 U2.12 220.535,190.349 218.1,192.784 U2.HS1 ; U1.3 231.347,190.309 233.822,192.784 U1.HS1 ; U1.23 U1.HS1 ; U1.13 U1.12 240.347,190.349 237.912,192.784 U1.HS1 ; U4.HS1 U4.HS1@177.498,192.784
  Top Layer w1.5: PS1.1 143.129,172.593 ; D2.2 143.129,172.593 ; C7.1 152.009,184.098 151.13,183.219 151.13,174.498 149.225,172.593 143.129,172.593
  Bottom Layer w1.5: PS1.1 D3.2 145.669,172.593 148.209,175.133 148.209,191.135 149.479,192.405 v1(172.212,192.405) v1(178.562,192.405) v1(192.405,192.405) ; 192.786,192.341 194.183,192.341 195.707,192.341 197.231,192.341 198.755,192.341 200.279,192.341 212.598,192.341 214.376,192.341 215.9,192.341 217.424,192.341 218.948,192.341 220.472,192.341 232.41,192.341 234.188,192.341 235.712,192.341 237.236,192.341 238.76,192.341 v1@240.284,192.341 ; v1(240.284,192.405) 240.612,192.405 241.49,191.526 v1(241.49,163.543)
  other v1: 173.99,192.405 175.514,192.405 177.038,192.405 180.086,192.405 194.183,192.405 195.707,192.405 197.231,192.405 198.755,192.405 200.279,192.405 212.598,192.405 214.376,192.405 215.9,192.405 217.424,192.405 218.948,192.405 220.472,192.405 232.41,192.405 234.188,192.405 235.712,192.405 237.236,192.405 238.76,192.405
VCC: C8.2 C9.2 C13.1 C14.1 C15.1 C16.1 C17.1 D5.2 P7.4 P8.2 P9.2 P10.2 P11.2 P12.2 P13.2 P14.2 P15.4 P16.4 P17.4 P18.4 P19.1 R24.1 R26.2 R28.2 R30.2 R31.2 R34.2 R35.2 SW2.2 U5.9 U5.24 U5.36 U5.48 U6.8 UP1.2 | length 358.7
  Top Layer w0.3: v1(140.208,165.227) v1@140.224,165.211 ; SW2.2@177.8,133.49 179.718,133.49 180.467,134.239 180.467,138.303 181.483,139.319 188.976,139.319 191.389,141.732 191.389,147.32 193.06,148.991 v1(194.691,148.991) U5.9 204.089,148.991 ; U5.48 200.45,152.737 201.803,151.384 204.089,151.384 ; v1(209.408,158.242) 209.405,158.239 208.658,158.239 207.957,157.538 207.957,153.001 207.947,152.991 U5.36 205.696,152.991 204.089,151.384 ; P16.4 217.838,143.637 206.756,143.637 205.95,144.443 U5.24 205.95,147.765 204.724,148.991 204.089,148.991 ; 204.089,148.991 204.089,151.384
  Top Layer w0.8: v1(147.066,135.509) 147.066,131.699 148.024,130.741 148.024,129.479 U6.8
  Top Layer w1: v1@140.224,165.211 C8.2 149.479,161.036 152.394,158.121 154.299,158.121 P7.4 ; R26.2 144.272,122.936 C9.2 U6.8 ; R28.2 v1(143.129,155.194) ; SW2.2 177.146,132.963 177.146,123.59 178.054,122.682 P8.2 P9.2 P10.2 P11.2 P12.2 P13.2 P14.2 ; P18.4 P17.4 ; P16.4 P15.4 225.679,145.194 P19.1@225.679,152.826
  Bottom Layer w0.3: 213.106,160.528 213.188,160.446 C17.1 C16.1
  Bottom Layer w0.5: v1(209.408,158.242) 211.963,158.242 213.106,159.385 213.106,160.528 D5.2
  Bottom Layer w1: v1(140.208,165.227) 140.215,165.22 142.017,165.22 UP1.2 144.448,165.213 145.034,164.627 145.034,157.099 v1(143.129,155.194) 142.621,154.686 134.874,154.686 132.588,152.4 132.588,148.209 134.62,146.177 134.62,137.287 136.375,135.532 R30.2 160.274,135.538 160.499,135.763 165.51,135.763 165.735,135.988 R31.2 165.798,136.057 172.402,136.057 R24.1 172.466,132.666 173.052,132.08 174.371,132.08 ; C14.1 C13.1 174.371,132.08 ; P17.4 P18.4 178.054,133.35 v1(177.8,133.604) 177.8,132.842 177.038,132.08 174.371,132.08 ; R34.2 R35.2 209.042,140.335 212.25,143.543 P16.4 P15.4
pads on no net: P20.1 P20.2 P20.3 P20.4 S1.1 U1.2 U1.6 U1.8 U1.11 U1.14 U1.17 U1.22 U1.24 U1.29 U2.2 U2.6 U2.8 U2.11 U2.14 U2.17 U2.22 U2.24 U2.29 U3.2 U3.6 U3.8 U3.11 U3.14 U3.17 U3.22 U3.24 U3.29 U4.2 U4.6 U4.8 U4.11 U4.14 U4.17 U4.22 U4.24 U4.29 U5.1 U5.4 U5.10 U5.20 U5.29 U5.38 U6.2 U6.4 U6.5 U6.6 U6.7 U6.9 U6.10 U6.11 U6.12 U6.13 U6.14 U6.19 U6.20 UP1.4

## Other copper
Top Layer:
  text "I.K.I.U." at 240.538,127 h2 r90
  text "@Work 2022 - v1.0" at 242.824,127 h1 r90
Bottom Layer:
  rectangle net GND: 200.533,147.574 205.74,152.654

## Silkscreen, mask and mechanical layers (free items; w line width, h text height)
Mechanical 1:
  the board outline again, w0.254

## Text inside footprints (layer, text, board x,y; h text height)
C6: Top Overlay "+" at 157.691,166.302 h1 r270
C7: Top Overlay "+" at 155.491,183.198 h1 r90
C10: Top Overlay "+" at 240.327,162.199 h1 r90
S2: Top Overlay "ON" at 163.931,150.808 h1 r90